# Altium PCB Earphone-1.PcbDoc
Units mm, origin at the board's own origin, x right, y up, seen from the top; angles counter-clockwise.
Board outline 20 x 47 mm, 2 copper layers (Top Layer, Bottom Layer); 75 components, 51 nets, 234 pads, 0 vias.
Unrouted connection lines stored in the file: 158.
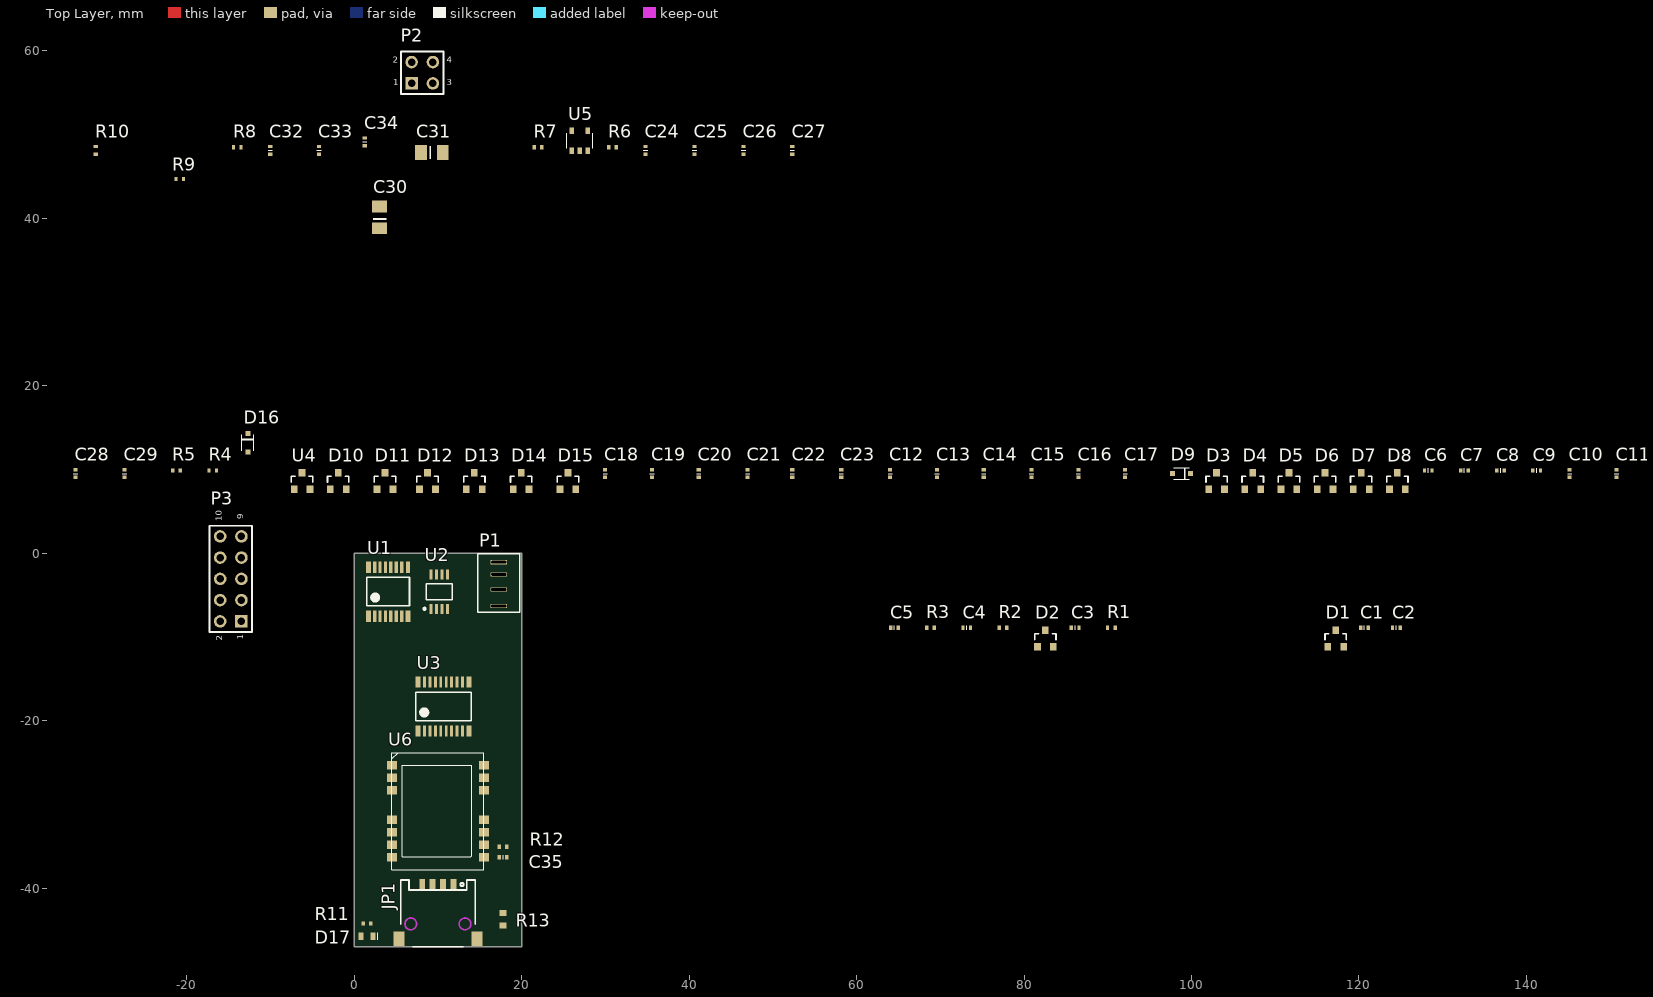
[diagram p0: Top Layer view]
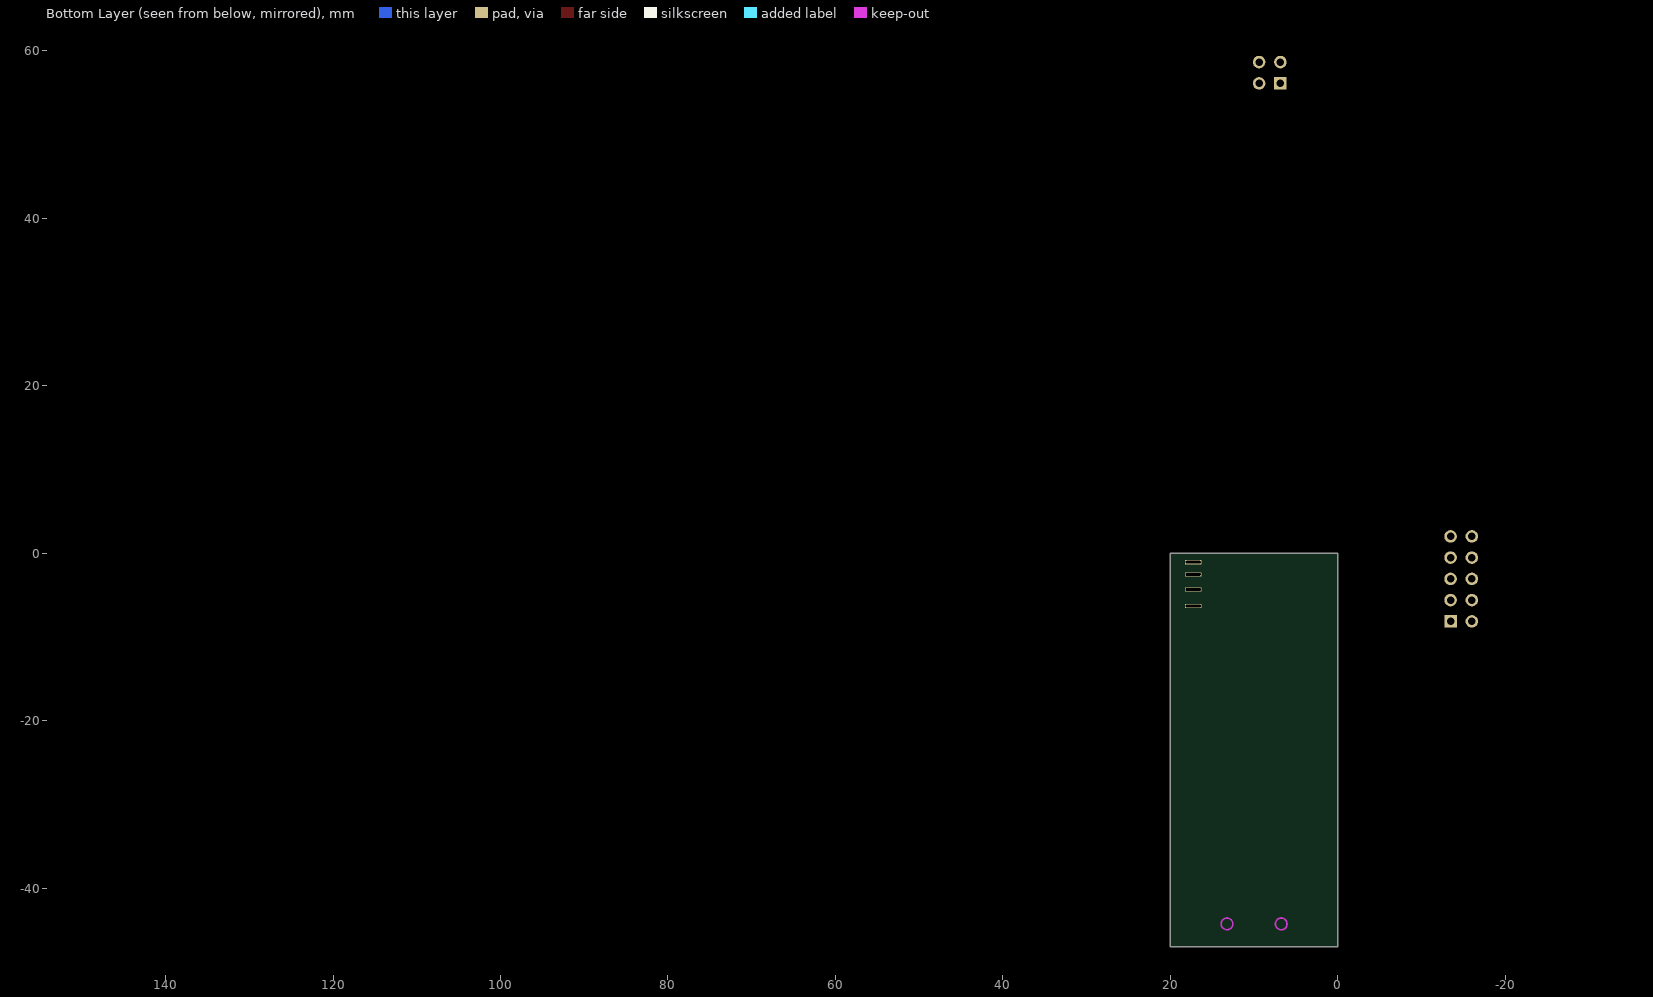
[diagram p1: Bottom Layer view, seen from below]

## Layer stack, top to bottom
Top Layer: signal copper 0.0356
Dielectric: dielectric 0.32, FR-4, Dk 4.8
Bottom Layer: signal copper 0.0356

## Board outline
0,-47 0,0 20,0 20,-47

## Design rules (kind name [scope] priority, off if disabled: settings)
Clearance [All] p1: gap=0.254
PolygonConnect [All] p1: connectstyle=Relief reliefconductorwidth=0.254 reliefentries=4 polygonreliefangle="90 Angle"
RoutingVias [All] p1: holewidth=0.711 width=1.27 viastyle="Through Hole" minholewidth=0.711 minwidth=1.27 maxholewidth=0.711 maxwidth=1.27
SilkscreenOverComponentPads [All] p1: minsilkscreentomaskgap=0.254
SolderMaskExpansion [All] p1: expansion=0.102
TestPointUsage [All] p1: valid=0 allowmultiple=FALSE
Testpoint [All] p1: side=15 testpointundercomponent=TRUE minsize=1.016 maxsize=2.54 preferedsize=1.524 minholesize=0 maxholesize=1.016 preferedholesize=0.813 testpointgrid=0.025 style=1023 order=0-112345678
Width [All] p1: maxlimit=0.254 minlimit=0.254 preferedwidth=0.254
23 further rules are at their usual default settings.

## Components (designator, comment, footprint, x,y, rotation, side; value= is the part's Value field where it differs from the comment)
C1 "10nF" 0402C 120.65,-8.89 r0 top
C2 "10nF" 0402C 124.46,-8.89 r0 top
C3 "2.2uF" 0402C 86.106,-8.89 r0 top
C4 "47pF" 0402C 73.152,-8.89 r0 top
C5 "10nF" 0402C 64.516,-8.89 r0 top
C6 "10uF" 0402C 128.27,9.906 r0 top
C7 "10uF" 0402C 132.588,9.906 r0 top
C8 "10uF" 0402C 136.906,9.906 r0 top
C9 "10uF" 0402C 141.224,9.906 r0 top
C10 "10uF" 0402C 145.161,9.525 r90 top
C11 "10uF" 0402C 150.749,9.525 r90 top
C12 "10uF" 0402C 64.008,9.525 r90 top
C13 "10uF" 0402C 69.596,9.525 r90 top
C14 "10uF" 0402C 75.184,9.525 r90 top
C15 "10uF" 0402C 80.899,9.525 r90 top
C16 "10uF" 0402C 86.487,9.525 r90 top
C17 "10uF" 0402C 92.075,9.525 r90 top
C18 "10uF" 0402C 29.972,9.525 r90 top
C19 "10uF" 0402C 35.56,9.525 r90 top
C20 "10uF" 0402C 41.148,9.525 r90 top
C21 "10uF" 0402C 46.99,9.525 r90 top
C22 "10uF" 0402C 52.324,9.525 r90 top
C23 "10uF" 0402C 58.166,9.525 r90 top
C24 "10uF" 0402C 34.798,48.133 r90 top
C25 "10uF" 0402C 40.64,48.133 r90 top
C26 "10uF" 0402C 46.482,48.133 r90 top
C27 "10uF" 0402C 52.324,48.133 r90 top
C28 "10uF" 0402C -33.274,9.525 r90 top
C29 "10uF" 0402C -27.432,9.525 r90 top
C30 "100uF" T3216-18[A] 3.048,40.132 r90 top
C31 "47uF" T3216-18[A] 9.271,47.879 r0 top
C32 "100nF" 0402C -10.033,48.133 r90 top
C33 "100nF" 0402C -4.191,48.133 r90 top
C34 "10uF" 0402C 1.27,49.149 r90 top
C35 "1uF" 0402C 17.78,-36.3 r180 top
D1 "PESD5V2S2UT" SOT23 117.221,-10.16 r0 top
D2 "PESD5V2S2UT" SOT23 82.55,-10.16 r0 top
D3 "BAT721S" SOT23 102.997,8.636 r0 top
D4 "BAT721S" SOT23 107.315,8.636 r0 top
D5 "BAT721S" SOT23 111.633,8.636 r0 top
D6 "BAT721S" SOT23 115.951,8.636 r0 top
D7 "BAT721S" SOT23 120.269,8.636 r0 top
D8 "BAT721S" SOT23 124.587,8.636 r0 top
D9 "PMEG4002EJ" SOD323 98.806,9.525 r0 top
D10 "BAT721S" SOT23 -1.905,8.636 r0 top
D11 "BAT721S" SOT23 3.683,8.636 r0 top
D12 "BAT721S" SOT23 8.763,8.636 r0 top
D13 "BAT721S" SOT23 14.351,8.636 r0 top
D14 "BAT721S" SOT23 19.939,8.636 r0 top
D15 "BAT721S" SOT23 25.527,8.636 r0 top
D16 "PMEG4002EJ" SOD323 -12.7,13.208 r90 top
D17 "LED" 0603L 1.524,-45.72 r0 top
JP1 "TEST_PAPER" TEST_PAPER 10,-42.8 r0 top
P1 "EarPhone" EarPhone 17.272,-3.556 r0 top
P2 "Header-2X2" header-2x2(2.54) 8.128,57.404 r0 top
P3 "SWD" header-2x5(2.54) -14.732,-3.048 r90 top
R1 "1K" 0402R 90.424,-8.89 r0 top
R2 "1K" 0402R 77.47,-8.89 r0 top
R3 "2.2K" 0402R 68.834,-8.89 r0 top
R4 "10K" 0402R -16.891,9.906 r0 top
R5 "100K" 0402R -21.209,9.906 r0 top
R6 "10K" 0402R 30.861,48.514 r0 top
R7 "10K" 0402R 21.971,48.514 r0 top
R8 "DNP" 0402R -13.97,48.514 r0 top
R9 "4.7K" 0402R -20.828,44.704 r0 top
R10 "470K" 0402R -30.861,48.133 r90 top
R11 "10K" 0402R 1.524,-44.196 r180 top
R12 "10K" 0402R 17.78,-35.052 r0 top
R13 "NTC" 0603R 17.78,-43.688 r90 top
U1 "NX3L4053PW" TSSOP16 4.064,-4.572 r90 top
U2 "NCX2220DP" TSSOP8 10.16,-4.572 r90 top
U3 "LPC812M101_20" TSSOP20 10.668,-18.288 r90 top
U4 "MAX809" SOT23 -6.223,8.636 r0 top
U5 "LD6806TD/33P" "SOT753 (TSOP5)" 26.924,49.276 r0 top
U6 "RB1402" RB1402 10,-30.8 r0 top

## Footprints (in the part's own frame and the unit in brackets; to place one, negate y for a bottom-side part, rotate by r counter-clockwise, add the part's x,y. Pads: shape width x height; smd on the part's side, far side on the other; paste and mask are expansions set on the pad)
0402C [mm]
  rect 0.4x0.5 smd: 1(-0.45,0) 2(0.45,0)
  silkscreen extent 0,-0.25 0,0.25, body extent -0.5,-0.25 0.5,0.25, height 0.5
0402R [mm]
  rect 0.4x0.508 smd: 1(-0.45,0) 2(0.45,0)
  body extent -0.5,-0.25 0.5,0.25, height 0.35
0603L [mm]
  rect 0.6x0.9 smd: 1(-0.725,0) 2(0.725,0)
  silkscreen extent 1.3,-0.4 1.3,0.4, body extent -0.8,-0.41 0.8,0.39, height 0.6
0603R [mm]
  rect 0.7x0.85 smd: 1(-0.75,0) 2(0.75,0)
  body extent -0.77,-0.43 0.77,0.43, height 0.46
EarPhone [mm]
  rect 2x0.5 hole 0.3 slot 1.8 at 0 deg: 1(0,-2.74) 2(0,-0.75) 3(0,1.05) 4(0,2.5)
  silkscreen extent -2.5,-3.5 2.5,3.5
header-2x2(2.54) [mm]
  rect 1.5x1.5 hole 0.9: 1(-1.27,-1.27)
  round 1.5 hole 0.9: 2(-1.27,1.27) 3(1.27,-1.27) 4(1.27,1.27)
  silkscreen extent -2.54,-2.54 2.54,2.54, body extent -2.54,-2.54 2.54,2.54, height 8.51
header-2x5(2.54) [mm]
  rect 1.5x1.5 hole 0.9: 1(-5.08,-1.27)
  round 1.5 hole 0.9: 2(-5.08,1.27) 3(-2.54,-1.27) 4(-2.54,1.27) 5(0,-1.27) 6(0,1.27) 7(2.54,-1.27) 8(2.54,1.27) 9(5.08,-1.27) 10(5.08,1.27)
  silkscreen extent -6.35,-2.54 6.35,2.54, body extent -6.35,-2.54 6.35,2.54, height 8.51
RB1402 [mm]
  rect 1.2x1 smd: 1(-5.5,5.5) 2(-5.5,4) 3(-5.5,2.5) 4(-5.5,-1) 5(-5.5,-2.5) 6(-5.5,-4) 7(-5.5,-5.5) 8(5.5,-5.5) 9(5.5,-4) 10(5.5,-2.5) 11(5.5,-1) 12(5.5,2.5) 13(5.5,4) 14(5.5,5.5)
  silkscreen extent -5.5,-7 5.5,7
SOD323 [mm]
  rect 0.6x0.6 smd: 1(-1.1,0) 2(1.1,0)
  silkscreen extent -0.95,-0.7 0.95,0.7, body extent -1.26,-0.63 1.24,0.63, height 1.1
SOT23 [mm]
  rect 0.8x0.9 smd: 1(-0.95,-1) 2(0.95,-1) 3(0,1)
  silkscreen extent -1.28,-0.13 1.28,0.57, body extent -1.4,-1.07 1.4,1.03, height 0.9
"SOT753 (TSOP5)" [mm]
  rect 0.55x0.8 smd: 1(-0.95,-1.2) 2(0,-1.2) 3(0.95,-1.2) 4(0.95,1.2) 5(-0.95,1.2)
  silkscreen extent -1.55,-0.9 1.55,0.9, body extent -1.45,-1.42 1.45,1.4, height 1.1
T3216-18[A] [mm]
  rect 1.4x1.8 smd: 1(-1.3,0) 2(1.3,0)
  silkscreen extent -0.3,-0.8 -0.1,0.8, body extent -1.6,-0.81 1.6,0.79, height 1.62
TEST_PAPER [mm]
  rect 1.3x1.8 smd: 0(-4.65,-3.25) 0(4.65,-3.25)
  rect 0.7x1.3 smd: 1(1.875,3.25) 2(0.625,3.25) 3(-0.625,3.25) 4(-1.875,3.25)
  Keep-Out Layer circle w0.2: c-3.24,-1.45 r0.7
  Keep-Out Layer circle w0.2: c3.24,-1.45 r0.7
  silkscreen extent -4.45,-4.2 4.45,3.8
TSSOP8 [mm]
  rect 1.2x0.35 smd: 1(-2.05,0.975) 2(-2.05,0.325) 3(-2.05,-0.325) 4(-2.05,-0.975) 5(2.05,-0.975) 6(2.05,-0.325) 7(2.05,0.325) 8(2.05,0.975)
  silkscreen extent -2.17,-1.55 0.95,1.87, body extent -2.46,-1.5 2.46,1.5, height 0.98
TSSOP16 [mm]
  rect 1.35x0.6 smd: 1(-2.925,2.375) 8(-2.925,-2.375) 16(2.925,2.375)
  rect 1.35x0.4 smd: 2(-2.925,1.625) 3(-2.925,0.975) 4(-2.925,0.325) 5(-2.925,-0.325) 6(-2.925,-0.975) 7(-2.925,-1.625) 10(2.925,-1.625) 11(2.925,-0.975) 12(2.925,-0.325) 13(2.925,0.325) 14(2.925,0.975) 15(2.925,1.625)
  rect 1.35x0.5 smd: 9(2.925,-2.375)
  silkscreen extent -1.7,-2.55 1.7,2.55, body extent -3.21,-2.55 3.21,2.55, height 1
TSSOP20 [mm]
  rect 1.35x0.6 smd: 1(-2.925,3.025) 10(-2.925,-3.025) 11(2.925,-3.025) 20(2.925,3.025)
  rect 1.35x0.35 smd: 2(-2.925,2.275) 3(-2.925,1.625) 4(-2.925,0.975) 5(-2.925,0.325) 6(-2.925,-0.325) 7(-2.925,-0.975) 8(-2.925,-1.625) 9(-2.925,-2.275) 12(2.925,-2.275) 13(2.925,-1.625) 14(2.925,-0.975) 15(2.925,-0.325) 16(2.925,0.325) 17(2.925,0.975) 18(2.925,1.625) 19(2.925,2.275)
  silkscreen extent -1.7,-3.3 1.7,3.3, body extent -3.21,-3.25 3.21,3.25, height 1

## Part data
C1 C2 C3 C4 C5 C6 C7 C8 C9 C10 C11 C12 C13 C14 C15 C16 C17 C18 C19 C20 C21 C22 C23 C24 C25 C26 C27 C28 C29 C32 C33 C34 C35: library part CAP
C30 C31: library part "CAP POL2"
D1 D2 D3 D4 D5 D6 D7 D8 D10 D11 D12 D13 D14 D15 U4: "SOT23"
D9 D16: "SOD323F"
P3: library part Header-2X5
R1 R2 R3 R4 R5 R6 R7 R8 R9 R10 R11 R12 R13: library part RES
U1: "TSSOP16(SOT403-1)"
U2: "TSSOP8(SOT505-2)"
U3: "TSSOP20"
U5: "TSOP5(SOT753)"

## Nets (pads, with @x,y where several pads share a name; then routed paths per layer and width w, separated by ;. In a path a pad name is that pad's centre, name@x,y a point inside that pad or via, vN(x,y) a via of type N, cw(c..) or ccw(c..) an arc to the next point about the centre after c; other vN are vias at no path point)
AINO: JP1.4 U6.4
G/M: D2.2 P1.4 R3.1 U1.1 U1.12 U2.3
GND: C1.1 C2.2 C4.1 C5.1 C12.1 C13.1 C14.1 C15.1 C16.1 C17.1 C24.1 C25.1 C26.1 C27.1 C28.1 C29.1 C30.2 C31.2 C32.1 C33.1 C34.2 C35.1 D1.3 D2.3 D3.1 D10.1 D17.2 JP1.1 P3.3 P3.5 P3.6 P3.9 R2.2 R7.2 R10.1 R13.1 U1.4 U1.8 U1.15 U2.4 U3.16 U4.1 U5.2 U6.6 U6.7 U6.14
L-CH: C18.2 C19.2 C20.2 C21.2 C22.2 C23.2 D1.1 P1.1
M/G: D2.1 P1.3 R3.2 U1.2 U1.13 U2.2
MIC: C3.1 R2.1 U1.14
NetC3_2: C3.2 C4.2 R1.2
NetC6_1: C6.1 D3.3
NetC7_1: C7.1 D4.3
NetC8_1: C8.1 D5.3
NetC9_1: C9.1 D6.3
NetC10_1: C10.1 D7.3
NetC11_1: C11.1 D8.3
NetC12_2: C12.2 D3.2 D4.1
NetC13_2: C13.2 D4.2 D5.1
NetC14_2: C14.2 D5.2 D6.1
NetC15_2: C15.2 D6.2 D7.1
NetC18_1: C18.1 D10.3
NetC19_1: C19.1 D11.3
NetC20_1: C20.1 D12.3
NetC21_1: C21.1 D13.3
NetC22_1: C22.1 D14.3
NetC23_1: C23.1 D15.3
NetC24_2: C24.2 D10.2 D11.1
NetC25_2: C25.2 D11.2 D12.1
NetC26_2: C26.2 D12.2 D13.1
NetC27_2: C27.2 D13.2 D14.1
NetC28_2: C28.2 D14.2 D15.1
NetC29_2: C29.2 D15.2 D16.2
NetC35_2: C35.2 R12.1 U6.8
NetD17_1: D17.1 R11.2
NetR4_2: R4.2 R5.1 U4.2
NTC: R13.2 U6.5
P02: P3.2 R6.2 U3.7
P03: P3.4 R7.1 U3.6
P05: P3.10 R4.1 U3.4
P06: U2.1 U3.18
P07: U1.9 U1.10 U1.11 U3.17
P14: R1.1 U3.20
P15: U1.6 U3.11
PT15: JP1.2 U6.12
PT16: JP1.3 U6.13
R-CH: C6.2 C7.2 C8.2 C9.2 C10.2 C11.2 D1.2 P1.2
RXD: U3.19 U6.11
V-EN: R8.2 R9.2 R10.2 U5.3
V-IN: C30.1 C32.2 P2.2 P2.4 U5.1
VCC: C1.2 C2.1 C5.2 C31.1 C33.2 C34.1 P3.1 R5.2 R6.1 R11.1 R12.2 U1.16 U2.8 U3.15 U4.3 U5.5 U6.1
VL-EN: C16.2 D7.2 D8.1 R8.1
VL-IN: C17.2 D8.2 D9.2 R9.1
VPL-IN: D16.1 P2.3
VPR-IN: D9.1 P2.1
pads on no net: JP1.0 P3.7 P3.8 U1.3 U1.5 U1.7 U2.5 U2.6 U2.7 U3.1 U3.2 U3.3 U3.5 U3.8 U3.9 U3.10 U3.12 U3.13 U3.14 U5.4 U6.2 U6.3 U6.9 U6.10

## Silkscreen, mask and mechanical layers (free items; w line width, h text height)
Mechanical 1:
  the board outline again, w0.1

## Text inside footprints (layer, text, board x,y; h text height)
C30: Mechanical 15 "+" at 3.556,38.735 h1.5 r90; Mechanical 15 "-" at 3.429,41.021 h1.5 r90
C31: Mechanical 15 "+" at 7.874,47.371 h1.5; Mechanical 15 "-" at 10.16,47.498 h1.5
P2: Top Overlay "1" at 4.674,55.601 h1.27; Top Overlay "2" at 4.597,58.268 h1.27; Top Overlay "4" at 11.074,58.268 h1.27; Top Overlay "3" at 11.074,55.601 h1.27
P3: Top Overlay "10" at -15.494,3.81 h1.27 r90; Top Overlay "9" at -12.954,4.064 h1.27 r90; Top Overlay "1" at -12.954,-10.312 h1.27 r90; Top Overlay "2" at -15.469,-10.414 h1.27 r90